# EAGLE board CT_schematic (EAGLE 7.6.0)

Size 100 x 80 mm. Coordinates in mm from the lower left corner, seen from the top.
Outline: 0,0 100,0 100,80 0,80 0,0
Copper layers (1*16): Top 0.035mm / dielectric 1.5mm / Bottom 0.035mm
Design rules "default": minimum track width 10mil, minimum drill 24mil, track to track 8mil, track to pad 8mil, pad to pad 8mil, via to via 8mil, smd to smd 8mil, copper to edge 40mil, drill to drill 8mil, minimum pad ring 10mil, minimum via ring 8mil, stop-mask expansion 4mil, vias tented up to drill 0mil, thermal gap 10mil

## Footprints (pad centres in the part's own frame; a part is rotated, then mirrored left to right if it is on the bottom)
C0603 = smd 0.8 x 0.8: 1 -0.762,0; 2 0.762,0
C0402 = smd 0.5 x 0.5: 1 -0.508,0; 2 0.508,0
C1210 = smd 1.2 x 2.5: 1 -1.524,0; 2 1.524,0
C0805 = smd 1.2 x 1.3: 1 -1.016,0; 2 1.016,0
R0603 = smd 0.8 x 0.8: 1 -0.762,0; 2 0.762,0
EXV-9H = smd 3.505 x 1.676: 1 -2.857,0; 2 2.857,0
L0603 = smd 0.8 x 0.8: 1 -0.762,0; 2 0.762,0
PJ-037B_PACKAGE = drill 3.7 square: 1 12,0 | drill 3.2 square: 2 6,0
LQFP208 = smd 0.3 x 1.2: 1 -12.75,-14.4; 2 -12.25,-14.4; 3 -11.75,-14.4; 4 -11.25,-14.4; 5 -10.75,-14.4; 6 -10.25,-14.4; 7 -9.75,-14.4; 8 -9.25,-14.4; 9 -8.75,-14.4; 10 -8.25,-14.4; 11 -7.75,-14.4; 12 -7.25,-14.4; 13 -6.75,-14.4; 14 -6.25,-14.4; 15 -5.75,-14.4; 16 -5.25,-14.4; 17 -4.75,-14.4; 18 -4.25,-14.4; 19 -3.75,-14.4; 20 -3.25,-14.4; 21 -2.75,-14.4; 22 -2.25,-14.4; 23 -1.75,-14.4; 24 -1.25,-14.4; 25 -0.75,-14.4; 26 -0.25,-14.4; 27 0.25,-14.4; 28 0.75,-14.4; 29 1.25,-14.4; 30 1.75,-14.4; 31 2.25,-14.4; 32 2.75,-14.4; 33 3.25,-14.4; 34 3.75,-14.4; 35 4.25,-14.4; 36 4.75,-14.4; 37 5.25,-14.4; 38 5.75,-14.4; 39 6.25,-14.4; 40 6.75,-14.4; 41 7.25,-14.4; 42 7.75,-14.4; 43 8.25,-14.4; 44 8.75,-14.4; 45 9.25,-14.4; 46 9.75,-14.4; 47 10.25,-14.4; 48 10.75,-14.4; 49 11.25,-14.4; 50 11.75,-14.4; 51 12.25,-14.4; 52 12.75,-14.4; 105 12.75,14.4; 106 12.25,14.4; 107 11.75,14.4; 108 11.25,14.4; 109 10.75,14.4; 110 10.25,14.4; 111 9.75,14.4; 112 9.25,14.4; 113 8.75,14.4; 114 8.25,14.4; 115 7.75,14.4; 116 7.25,14.4; 117 6.75,14.4; 118 6.25,14.4; 119 5.75,14.4; 120 5.25,14.4; 121 4.75,14.4; 122 4.25,14.4; 123 3.75,14.4; 124 3.25,14.4; 125 2.75,14.4; 126 2.25,14.4; 127 1.75,14.4; 128 1.25,14.4; 129 0.75,14.4; 130 0.25,14.4; 131 -0.25,14.4; 132 -0.75,14.4; 133 -1.25,14.4; 134 -1.75,14.4; 135 -2.25,14.4; 136 -2.75,14.4; 137 -3.25,14.4; 138 -3.75,14.4; 139 -4.25,14.4; 140 -4.75,14.4; 141 -5.25,14.4; 142 -5.75,14.4; 143 -6.25,14.4; 144 -6.75,14.4; 145 -7.25,14.4; 146 -7.75,14.4; 147 -8.25,14.4; 148 -8.75,14.4; 149 -9.25,14.4; 150 -9.75,14.4; 151 -10.25,14.4; 152 -10.75,14.4; 153 -11.25,14.4; 154 -11.75,14.4; 155 -12.25,14.4; 156 -12.75,14.4 | smd 1.2 x 0.3: 53 14.4,-12.75; 54 14.4,-12.25; 55 14.4,-11.75; 56 14.4,-11.25; 57 14.4,-10.75; 58 14.4,-10.25; 59 14.4,-9.75; 60 14.4,-9.25; 61 14.4,-8.75; 62 14.4,-8.25; 63 14.4,-7.75; 64 14.4,-7.25; 65 14.4,-6.75; 66 14.4,-6.25; 67 14.4,-5.75; 68 14.4,-5.25; 69 14.4,-4.75; 70 14.4,-4.25; 71 14.4,-3.75; 72 14.4,-3.25; 73 14.4,-2.75; 74 14.4,-2.25; 75 14.4,-1.75; 76 14.4,-1.25; 77 14.4,-0.75; 78 14.4,-0.25; 79 14.4,0.25; 80 14.4,0.75; 81 14.4,1.25; 82 14.4,1.75; 83 14.4,2.25; 84 14.4,2.75; 85 14.4,3.25; 86 14.4,3.75; 87 14.4,4.25; 88 14.4,4.75; 89 14.4,5.25; 90 14.4,5.75; 91 14.4,6.25; 92 14.4,6.75; 93 14.4,7.25; 94 14.4,7.75; 95 14.4,8.25; 96 14.4,8.75; 97 14.4,9.25; 98 14.4,9.75; 99 14.4,10.25; 100 14.4,10.75; 101 14.4,11.25; 102 14.4,11.75; 103 14.4,12.25; 104 14.4,12.75; 157 -14.4,12.75; 158 -14.4,12.25; 159 -14.4,11.75; 160 -14.4,11.25; 161 -14.4,10.75; 162 -14.4,10.25; 163 -14.4,9.75; 164 -14.4,9.25; 165 -14.4,8.75; 166 -14.4,8.25; 167 -14.4,7.75; 168 -14.4,7.25; 169 -14.4,6.75; 170 -14.4,6.25; 171 -14.4,5.75; 172 -14.4,5.25; 173 -14.4,4.75; 174 -14.4,4.25; 175 -14.4,3.75; 176 -14.4,3.25; 177 -14.4,2.75; 178 -14.4,2.25; 179 -14.4,1.75; 180 -14.4,1.25; 181 -14.4,0.75; 182 -14.4,0.25; 183 -14.4,-0.25; 184 -14.4,-0.75; 185 -14.4,-1.25; 186 -14.4,-1.75; 187 -14.4,-2.25; 188 -14.4,-2.75; 189 -14.4,-3.25; 190 -14.4,-3.75; 191 -14.4,-4.25; 192 -14.4,-4.75; 193 -14.4,-5.25; 194 -14.4,-5.75; 195 -14.4,-6.25; 196 -14.4,-6.75; 197 -14.4,-7.25; 198 -14.4,-7.75; 199 -14.4,-8.25; 200 -14.4,-8.75; 201 -14.4,-9.25; 202 -14.4,-9.75; 203 -14.4,-10.25; 204 -14.4,-10.75; 205 -14.4,-11.25; 206 -14.4,-11.75; 207 -14.4,-12.25; 208 -14.4,-12.75
SAMTEC_FTSH-105-01-L-DV-K = smd 0.762 x 2.794: 1 -2.54,-2.032; 2 -2.54,2.032; 3 -1.27,-2.032; 4 -1.27,2.032; 5 0,-2.032; 6 0,2.032; 7 1.27,-2.032; 8 1.27,2.032; 9 2.54,-2.032; 10 2.54,2.032
LBGA-64 = smd 0.559 x 0.559: A1 -3.5,3.5; A2 -2.5,3.5; A3 -1.5,3.5; A4 -0.5,3.5; A5 0.5,3.5; A6 1.5,3.5; A7 2.5,3.5; A8 3.5,3.5; B1 -3.5,2.5; B2 -2.5,2.5; B3 -1.5,2.5; B4 -0.5,2.5; B5 0.5,2.5; B6 1.5,2.5; B7 2.5,2.5; B8 3.5,2.5; C1 -3.5,1.5; C2 -2.5,1.5; C3 -1.5,1.5; C4 -0.5,1.5; C5 0.5,1.5; C6 1.5,1.5; C7 2.5,1.5; C8 3.5,1.5; D1 -3.5,0.5; D2 -2.5,0.5; D3 -1.5,0.5; D4 -0.5,0.5; D5 0.5,0.5; D6 1.5,0.5; D7 2.5,0.5; D8 3.5,0.5; E1 -3.5,-0.5; E2 -2.5,-0.5; E3 -1.5,-0.5; E4 -0.5,-0.5; E5 0.5,-0.5; E6 1.5,-0.5; E7 2.5,-0.5; E8 3.5,-0.5; F1 -3.5,-1.5; F2 -2.5,-1.5; F3 -1.5,-1.5; F4 -0.5,-1.5; F5 0.5,-1.5; F6 1.5,-1.5; F7 2.5,-1.5; F8 3.5,-1.5; G1 -3.5,-2.5; G2 -2.5,-2.5; G3 -1.5,-2.5; G4 -0.5,-2.5; G5 0.5,-2.5; G6 1.5,-2.5; G7 2.5,-2.5; G8 3.5,-2.5; H1 -3.5,-3.5; H2 -2.5,-3.5; H3 -1.5,-3.5; H4 -0.5,-3.5; H5 0.5,-3.5; H6 1.5,-3.5; H7 2.5,-3.5; H8 3.5,-3.5
RHB32_3P45X3P45 = smd 0.85 x 0.28: 1 -2.475,1.75; 2 -2.475,1.25; 3 -2.475,0.75; 4 -2.475,0.25; 5 -2.475,-0.25; 6 -2.475,-0.75; 7 -2.475,-1.25; 8 -2.475,-1.75; 17 2.475,-1.75; 18 2.475,-1.25; 19 2.475,-0.75; 20 2.475,-0.25; 21 2.475,0.25; 22 2.475,0.75; 23 2.475,1.25; 24 2.475,1.75 | smd 0.28 x 0.85: 9 -1.75,-2.475; 10 -1.25,-2.475; 11 -0.75,-2.475; 12 -0.25,-2.475; 13 0.25,-2.475; 14 0.75,-2.475; 15 1.25,-2.475; 16 1.75,-2.475; 25 1.75,2.475; 26 1.25,2.475; 27 0.75,2.475; 28 0.25,2.475; 29 -0.25,2.475; 30 -0.75,2.475; 31 -1.25,2.475; 32 -1.75,2.475 | smd 3.45 x 3.45: 33 0,0
MICRO_USB_AB = smd 0.4 x 1.35: 1 1.3,0.26; 2 0.65,0.26; 3 0,0.26; 4 -0.65,0.26; 5 -1.3,0.26 | drill 0.6 pad 0.95 long: 6 4.175,-2.54; 7 -4.175,-2.54 | drill 0.7 pad 1.1 long: 8 -2.225,0.46; 9 2.225,0.46
SOT143B = smd 1 x 0.7: 1 -0.75,-1 | smd 0.6 x 0.7: 2 0.95,-1; 3 0.95,1; 4 -0.95,1
SOT-23-6 = smd 1.1 x 0.6: 1 -1.4,0.95; 2 -1.4,0; 3 -1.4,-0.95; 4 1.4,-0.95; 5 1.4,0; 6 1.4,0.95
ABLS-25.000MHZ-B2F-T = smd 5.6 x 2.8: 1 -3.81,0; 2 5.69,0
ASEK = smd 1.4 x 1: 1 -1.1,-0.8; 2 1.1,-0.8; 3 1.1,0.8; 4 -1.1,0.8
ASFL1 = smd 1.7 x 1.5: 1 -1.27,-1.1; 2 1.27,-1.1; 3 1.27,1.1; 4 -1.27,1.1
WSON-8 = smd 0.3 x 0.6: 1 -0.75,0; 2 0.05,0; 3 0.85,0; 4 1.65,0; 5 1.65,3.8; 6 0.85,3.8; 7 0.05,3.8; 8 -0.75,3.8 | smd 3 x 2.6: PAD 0.45,1.9
SON-6 = smd 0.55 x 0.3: 1 -0.355,0.5 | smd 0.52 x 0.3: 2 -0.37,0; 3 -0.37,-0.5; 4 0.37,-0.5; 5 0.37,0; 6 0.37,0.5
SW_4-1437565-2 = smd 1.4 x 2.1: 1 -2.23,4.55; 2 -2.23,-4.55; 3 2.23,4.55; 4 2.23,-4.55
LGM67K-G1J2-24-Z = smd 0.8 x 1.4: A -2,0; C 0,0
NC7SZ125M5X = smd 1.3 x 0.7: 1 -1.3,0.95; 2 -1.3,0; 3 -1.3,-0.95; 4 1.3,-0.95; 5 1.3,0.95
DUMMY_PACKAGE_239 = drill 0.3: 1 0,-1; 2 1.5,-1; 3 3,-1

## Placement (x,y rotation side)
C1  1e-06  [C0603]  -78.74,77.47 0 top  (outside the outline)
C2  1e-07  [C0603]  -82.55,77.47 0 top  (outside the outline)
C3  1e-07  [C0603]  -15.24,82.55 0 top  (outside the outline)
C4  1e-07  [C0603]  -19.05,82.55 0 top  (outside the outline)
C5  1e-07  [C0603]  -22.86,82.55 0 top  (outside the outline)
C6  1e-07  [C0603]  -26.67,82.55 0 top  (outside the outline)
C7  1e-07  [C0603]  -30.48,82.55 0 top  (outside the outline)
C8  1e-07  [C0603]  -34.29,82.55 0 top  (outside the outline)
C9  1e-07  [C0603]  -38.1,82.55 0 top  (outside the outline)
C10  1e-07  [C0603]  -41.91,82.55 0 top  (outside the outline)
C11  1e-07  [C0603]  -45.72,82.55 0 top  (outside the outline)
C12  1e-07  [C0603]  -49.53,82.55 0 top  (outside the outline)
C13  1e-07  [C0603]  -53.34,82.55 0 top  (outside the outline)
C14  1e-07  [C0603]  -57.15,82.55 0 top  (outside the outline)
C15  1e-07  [C0603]  -60.96,82.55 0 top  (outside the outline)
C16  1e-07  [C0603]  -64.77,82.55 0 top  (outside the outline)
C17  1e-07  [C0603]  -68.58,82.55 0 top  (outside the outline)
C18  1e-07  [C0603]  -72.39,82.55 0 top  (outside the outline)
C19  1e-07  [C0603]  -76.2,82.55 0 top  (outside the outline)
C20  4.7e-06  [C0603]  -59.69,77.47 0 top  (outside the outline)
C21  2.2e-06  [C0603]  -63.5,77.47 0 top  (outside the outline)
C22  2.2e-06  [C0603]  -67.31,77.47 0 top  (outside the outline)
C23  1e-08  [C0603]  -80.01,82.55 0 top  (outside the outline)
C24  1e-06  [C0603]  -83.82,82.55 0 top  (outside the outline)
C25  1e-07  [C0603]  -15.24,87.63 0 top  (outside the outline)
C26  1e-11  [C0402]  -64.77,87.63 0 top  (outside the outline)
C27  1e-11  [C0402]  -68.58,87.63 0 top  (outside the outline)
C28  1e-07  [C0402]  -72.39,87.63 0 top  (outside the outline)
C29  1e-08  [C0402]  -76.2,87.63 0 top  (outside the outline)
C30  1e-08  [C0402]  -80.01,87.63 0 top  (outside the outline)
C31  1e-07  [C0402]  -83.82,87.63 0 top  (outside the outline)
C32  2.2e-06  [C0603]  -71.12,77.47 0 top  (outside the outline)
C33  1e-07  [C0402]  -15.24,92.71 0 top  (outside the outline)
C34  1e-07  [C0402]  -19.05,92.71 0 top  (outside the outline)
C35  2.2e-06  [C0603]  -74.93,77.47 0 top  (outside the outline)
C36  1e-06  [C0603]  -19.05,87.63 0 top  (outside the outline)
C37  1e-08  [C0402]  -22.86,92.71 0 top  (outside the outline)
C38  1e-08  [C0402]  -26.67,92.71 0 top  (outside the outline)
C39  1e-08  [C0402]  -30.48,92.71 0 top  (outside the outline)
C40  1e-05  [C1210]  -29.21,66.04 0 top  (outside the outline)
C41  1e-05  [C0805]  -83.82,64.77 0 top  (outside the outline)
C42  8e-07  [R0603]  -22.86,87.63 0 top  (outside the outline)
C43  1e-05  [C1210]  -35.56,66.04 0 top  (outside the outline)
C44  1e-08  [C0402]  -34.29,92.71 0 top  (outside the outline)
C45  1e-05  [C1210]  -41.91,66.04 0 top  (outside the outline)
C46  1e-05  [C1210]  -48.26,66.04 0 top  (outside the outline)
C47  1e-07  [C0402]  -38.1,92.71 0 top  (outside the outline)
C48  0.0001  [EXV-9H]  -38.1,58.42 0 top  (outside the outline)
C49  0.0001  [EXV-9H]  -49.53,58.42 0 top  (outside the outline)
C50  1e-08  [C0402]  -41.91,92.71 0 top  (outside the outline)
C51  1e-08  [C0402]  -45.72,92.71 0 top  (outside the outline)
C52  1e-08  [C0402]  -49.53,92.71 0 top  (outside the outline)
C53  1e-08  [C0402]  -53.34,92.71 0 top  (outside the outline)
F1  240.0  [L0603]  -26.67,87.63 0 top  (outside the outline)
J1  PJ-037B  [PJ-037B_PACKAGE]  -27.94,38.1 0 top  (outside the outline)
R2  1000.0  [R0603]  -30.48,87.63 0 top  (outside the outline)
R4  4700.0  [R0603]  -34.29,87.63 0 top  (outside the outline)
R5  4700.0  [R0603]  -38.1,87.63 0 top  (outside the outline)
R6  4700.0  [R0603]  -41.91,87.63 0 top  (outside the outline)
R7  10000.0  [R0603]  -52.07,72.39 0 top  (outside the outline)
R8  10000.0  [R0603]  -57.15,72.39 0 top  (outside the outline)
R9  10000.0  [R0603]  -62.23,72.39 0 top  (outside the outline)
R10  10000.0  [R0603]  -67.31,72.39 0 top  (outside the outline)
R11  10000.0  [R0603]  -72.39,72.39 0 top  (outside the outline)
R12  5.0  [R0603]  -45.72,87.63 0 top  (outside the outline)
R13  10000.0  [R0603]  -77.47,72.39 0 top  (outside the outline)
R14  10000.0  [R0603]  -82.55,72.39 0 top  (outside the outline)
R15  10000.0  [R0603]  -15.24,77.47 0 top  (outside the outline)
R16  10000.0  [R0603]  -20.32,77.47 0 top  (outside the outline)
R17  10000.0  [R0603]  -25.4,77.47 0 top  (outside the outline)
R18  47000.0  [R0603]  -30.48,77.47 0 top  (outside the outline)
R19  10000.0  [R0603]  -35.56,77.47 0 top  (outside the outline)
R20  10000.0  [R0603]  -40.64,77.47 0 top  (outside the outline)
R21  100000.0  [R0603]  -21.59,72.39 0 top  (outside the outline)
R22  806.0  [R0603]  -49.53,87.63 0 top  (outside the outline)
R23  1000.0  [R0603]  -53.34,87.63 0 top  (outside the outline)
R24  100000.0  [R0603]  -26.67,72.39 0 top  (outside the outline)
R25  153694.38  [R0603]  -16.51,72.39 0 top  (outside the outline)
R26  100000.0  [R0603]  -31.75,72.39 0 top  (outside the outline)
R27  100000.0  [R0603]  -36.83,72.39 0 top  (outside the outline)
R28  3900.0  [R0603]  -57.15,87.63 0 top  (outside the outline)
R29  1000.0  [R0603]  -60.96,87.63 0 top  (outside the outline)
R30  10000.0  [R0603]  -45.72,77.47 0 top  (outside the outline)
R31  10000.0  [R0603]  -50.8,77.47 0 top  (outside the outline)
R32  82000.0  [R0603]  -55.88,77.47 0 top  (outside the outline)
R33  300000.0  [R0603]  -41.91,72.39 0 top  (outside the outline)
R34  120000.0  [R0603]  -46.99,72.39 0 top  (outside the outline)
U1  STM32F756BGT6  [LQFP208]  -27.94,15.24 0 top  (outside the outline)
U2  FTSH-105-01-L-DV-K  [SAMTEC_FTSH-105-01-L-DV-K]  -80.01,7.62 0 top  (outside the outline)
U3  mt28ew256aba1HPC-0SIT  [LBGA-64]  -49.53,7.62 0 top  (outside the outline)
U4  TUSB1210BRHBR  [RHB32_3P45X3P45]  -80.01,58.42 0 top  (outside the outline)
U5  47590-0001  [MICRO_USB_AB]  -36.83,38.1 0 top  (outside the outline)
U6  prtr5v0u2ax  [SOT143B]  -66.04,92.71 0 top  (outside the outline)
U7  MAX4995AAUT+T  [SOT-23-6]  -53.34,64.77 0 top  (outside the outline)
U8  ABLS-25.000MHZ-B2F-T  [ABLS-25.000MHZ-B2F-T]  -68.58,58.42 0 top  (outside the outline)
U9  ASEK-32.768KHz-ECST  [ASEK]  -29.21,58.42 0 top  (outside the outline)
U10  ASFL1-19.2MHZ-NCS  [ASFL1]  -66.04,49.53 0 top  (outside the outline)
U11  LP3878SDX-ADJ/NOPB  [WSON-8]  -78.74,33.02 0 top  (outside the outline)
U12  LP2951ACSDX/NOPB  [WSON-8]  -48.26,48.26 0 top  (outside the outline)
U13  LP3878SDX-ADJ/NOPB  [WSON-8]  -30.48,48.26 0 top  (outside the outline)
U14  TPS3895ADRYR  [SON-6]  -74.93,91.44 0 top  (outside the outline)
U15  4-1437565-2  [SW_4-1437565-2]  -57.15,36.83 0 top  (outside the outline)
U16  Q65110A2395  [LGM67K-G1J2-24-Z]  -17.78,66.04 0 top  (outside the outline)
U17  nc7sz125m5x  [NC7SZ125M5X]  -58.42,64.77 0 top  (outside the outline)
U18  nc7sz125m5x  [NC7SZ125M5X]  -64.77,64.77 0 top  (outside the outline)
U19  nc7sz125m5x  [NC7SZ125M5X]  -71.12,64.77 0 top  (outside the outline)
U20  nc7sz125m5x  [NC7SZ125M5X]  -77.47,64.77 0 top  (outside the outline)
U21  Dummy  [DUMMY_PACKAGE_239]  -72.39,92.71 0 top  (outside the outline)

## Library data of the parts
C1-C53 F1 J1 R2 R4-R34 U1-U21 = circuit_tree

## Nets
CLK_CRYSTAL_U1_32: C26.1 U1.32 U8.1
CLK_CRYSTAL_U1_33: C27.1 U1.33 U8.2
CLK_U1_9: U1.9 U9.3
CLK_U4_1: U4.1 U10.3
GND: C1.2 C2.2 C3.2 C4.2 C5.2 C6.2 C7.2 C8.2 C9.2 C10.2 C11.2 C12.2 C13.2 C14.2 C15.2 C16.2 C17.2 C18.2 C19.2 C20.2 C21.2 C22.2 C23.2 C24.2 C25.2 C26.2 C27.2 C28.2 C29.2 C30.2 C31.2 C32.2 C33.2 C34.2 C35.2 C36.2 C37.2 C38.2 C39.2 C40.2 C41.2 C42.2 C43.2 C44.2 C45.2 C46.2 C47.2 C48.2 C49.2 C50.2 C51.2 C52.2 C53.2 J1.2 R2.2 R7.2 R12.2 R18.2 R20.2 R23.2 R26.2 R29.2 R32.2 R34.2 U1.14 U1.25 U1.40 U1.51 U1.60 U1.72 U1.82 U1.93 U1.114 U1.125 U1.136 U1.149 U1.170 U1.184 U1.202 U2.3 U2.5 U3.E8 U3.H2 U3.H7 U4.33 U5.5 U5.6 U5.7 U5.8 U5.9 U6.1 U7.2 U9.2 U10.2 U11.3 U11.PAD U12.3 U12.4 U12.PAD U13.3 U13.PAD U14.2 U16.C U17.2 U17.3 U18.1 U18.3 U19.1 U19.3 U20.1 U20.3 U21.1
NET_U1_34: R5.1 U1.34 U19.4
NET_U1_42: C23.1 C24.1 F1.1 U1.41 U1.42
NET_U1_92: C21.1 U1.92
NET_U1_148: C22.1 U1.148
NET_U1_197: R7.1 U1.197
NET_U1_203: R8.1 U1.203
NET_U1_207: U16.A
NET_U1_208: U15.3 U15.4
NET_U2_9: R12.1 U2.9
NET_U3_B4: R16.1 U3.B4
NET_U3_B5: R4.1 U3.B5 U18.4
NET_U4_11: R19.1 U4.11
NET_U4_12: C35.1 U4.12
NET_U4_14: R20.1 U4.14
NET_U4_20: C32.1 U4.20
NET_U4_27: R6.1 U4.27 U20.4
NET_U5_1: C36.1 U4.22 U5.1 U6.4 U7.1
NET_U5_2: U4.19 U5.2 U6.3
NET_U5_3: U4.18 U5.3 U6.2
NET_U5_4: U4.23 U5.4
NET_U7_3: R18.1 U7.3
NET_U7_4: U4.17 U7.4
NET_U11_1: C39.1 U11.1
NET_U11_6: R22.2 R23.1 U11.6
NET_U11_8: R21.1 U11.8
NET_U12_5: R24.1 U12.5
NET_U12_7: R25.2 R26.1 U12.7
NET_U13_1: C44.1 U13.1
NET_U13_6: R28.2 R29.1 U13.6
NET_U13_8: R27.1 U13.8
NET_U14_1: R31.1 R32.1 U14.1
NET_U14_3: R33.2 R34.1 U14.3
NET_U14_4: R30.1 U14.4 U17.4 U18.2 U19.2 U20.2
NET_U15_1: R2.1 U15.1 U15.2
PROC_FMC_A0: U1.16 U3.E2
PROC_FMC_A1: U1.17 U3.D2
PROC_FMC_A2: U1.18 U3.C2
PROC_FMC_A3: U1.22 U3.A2
PROC_FMC_A4: U1.23 U3.B2
PROC_FMC_A5: U1.24 U3.D3
PROC_FMC_A6: U1.71 U3.C3
PROC_FMC_A7: U1.74 U3.A3
PROC_FMC_A8: U1.75 U3.B6
PROC_FMC_A9: U1.76 U3.A6
PROC_FMC_A10: U1.77 U3.C6
PROC_FMC_A11: U1.78 U3.D6
PROC_FMC_A12: U1.129 U3.B7
PROC_FMC_A13: U1.130 U3.A7
PROC_FMC_A14: U1.131 U3.C7
PROC_FMC_A15: U1.132 U3.D7
PROC_FMC_A16: U1.111 U3.E7
PROC_FMC_A17: U1.112 U3.B3
PROC_FMC_A18: U1.113 U3.C4
PROC_FMC_A19: U1.2 U3.D5
PROC_FMC_A20: U1.3 U3.D4
PROC_FMC_A21: U1.4 U3.C5
PROC_FMC_A22: U1.5 U3.B8
PROC_FMC_A23: U1.1 U3.C8
PROC_FMC_D0: U1.116 U3.E3
PROC_FMC_D1: U1.117 U3.H3
PROC_FMC_D2: U1.164 U3.E4
PROC_FMC_D3: U1.165 U3.H4
PROC_FMC_D4: U1.79 U3.H5
PROC_FMC_D5: U1.80 U3.E5
PROC_FMC_D6: U1.81 U3.H6
PROC_FMC_D7: U1.84 U3.E6
PROC_FMC_D8: U1.85 U3.F3
PROC_FMC_D9: U1.86 U3.G3
PROC_FMC_D10: U1.87 U3.F4
PROC_FMC_D11: U1.88 U3.G4
PROC_FMC_D12: U1.89 U3.F5
PROC_FMC_D13: U1.108 U3.G6
PROC_FMC_D14: U1.109 U3.F6
PROC_FMC_D15: U1.110 U3.G7
PROC_FMC_NBL0: R17.1 U1.200 U3.F7
PROC_FMC_NE2: R13.1 U1.178 U3.F2
PROC_FMC_NOE: R14.1 U1.168 U3.G2
PROC_FMC_NWAIT: U1.172 U3.A4
PROC_FMC_NWE: R15.1 U1.169 U3.A5
PROC_PC13: U1.8 U21.3
PROC_PI8: U1.7 U21.2
PROC_SYS_JTCK_SWCLK: R10.1 U1.159 U2.4
PROC_SYS_JTDO_SWO: U1.192 U2.6
PROC_SYS_JTMS_SWDIO: R11.1 U1.147 U2.2
PROC_USB_OTG_HS_ULPI_CK: U1.54 U4.26
PROC_USB_OTG_HS_ULPI_D0: U1.50 U4.3
PROC_USB_OTG_HS_ULPI_D1: U1.61 U4.4
PROC_USB_OTG_HS_ULPI_D2: U1.62 U4.5
PROC_USB_OTG_HS_ULPI_D3: U1.90 U4.6
PROC_USB_OTG_HS_ULPI_D4: U1.91 U4.7
PROC_USB_OTG_HS_ULPI_D5: U1.104 U4.9
PROC_USB_OTG_HS_ULPI_D6: U1.105 U4.10
PROC_USB_OTG_HS_ULPI_D7: U1.194 U4.13
PROC_USB_OTG_HS_ULPI_DIR: U1.13 U4.31
PROC_USB_OTG_HS_ULPI_NXT: U1.38 U4.2
PROC_USB_OTG_HS_ULPI_STP: U1.35 U4.29
RST_OUT_U2_JTAG_RST_B: R9.1 U2.10 U17.1
VCC_S1_13V8: C40.1 C42.1 C45.1 C48.1 C49.1 J1.1 R21.2 R27.2 U11.4 U12.8 U13.4
VCC_TIER1_1V8: C1.1 C2.1 C3.1 C4.1 C5.1 C6.1 C7.1 C8.1 C9.1 C10.1 C11.1 C12.1 C13.1 C14.1 C15.1 C16.1 C17.1 C18.1 C19.1 C20.1 C28.1 C29.1 C33.1 C34.1 C41.1 C47.1 C50.1 C51.1 C52.1 C53.1 F1.2 R4.2 R5.2 R6.2 R8.2 R9.2 R10.2 R11.2 R13.2 R14.2 R15.2 R16.2 R17.2 R19.2 R22.1 R30.2 R31.2 R33.1 U1.6 U1.15 U1.26 U1.39 U1.52 U1.59 U1.73 U1.83 U1.94 U1.103 U1.115 U1.124 U1.150 U1.158 U1.171 U1.185 U1.204 U2.1 U3.D8 U3.F1 U4.28 U4.30 U4.32 U11.5 U14.6 U17.5 U18.5 U19.5 U20.5
VCC_TIER1_3V3: C25.1 C30.1 C31.1 C37.1 C38.1 C43.1 R24.2 R25.1 U1.137 U3.G5 U4.21 U9.4 U10.4 U12.1
VCC_TIER1_5V0: C46.1 R28.1 U7.5 U13.5

## Tracks (layer width: path | path; a pad name or v marks a point on that pad's centre or on a via)
CLK_CRYSTAL_U1_32  (2 unrouted)
CLK_CRYSTAL_U1_33  (2 unrouted)
CLK_U1_9  (1 unrouted)
CLK_U4_1  (1 unrouted)
GND  (111 unrouted)
NET_U1_34  (2 unrouted)
NET_U1_42  (4 unrouted)
NET_U1_92  (1 unrouted)
NET_U1_148  (1 unrouted)
NET_U1_197  (1 unrouted)
NET_U1_203  (1 unrouted)
NET_U1_208  (1 unrouted)
NET_U2_9  (1 unrouted)
NET_U3_B4  (1 unrouted)
NET_U3_B5  (2 unrouted)
NET_U4_11  (1 unrouted)
NET_U4_12  (1 unrouted)
NET_U4_14  (1 unrouted)
NET_U4_20  (1 unrouted)
NET_U4_27  (2 unrouted)
NET_U5_1  (4 unrouted)
NET_U5_2  (2 unrouted)
NET_U5_3  (2 unrouted)
NET_U5_4  (1 unrouted)
NET_U7_3  (1 unrouted)
NET_U7_4  (1 unrouted)
NET_U11_1  (1 unrouted)
NET_U11_6  (2 unrouted)
NET_U11_8  (1 unrouted)
NET_U12_5  (1 unrouted)
NET_U12_7  (2 unrouted)
NET_U13_1  (1 unrouted)
NET_U13_6  (2 unrouted)
NET_U13_8  (1 unrouted)
NET_U14_1  (2 unrouted)
NET_U14_3  (2 unrouted)
NET_U14_4  (5 unrouted)
NET_U15_1  (2 unrouted)
PROC_FMC_A0  (1 unrouted)
PROC_FMC_A1  (1 unrouted)
PROC_FMC_A2  (1 unrouted)
PROC_FMC_A3  (1 unrouted)
PROC_FMC_A4  (1 unrouted)
PROC_FMC_A5  (1 unrouted)
PROC_FMC_A6  (1 unrouted)
PROC_FMC_A7  (1 unrouted)
PROC_FMC_A8  (1 unrouted)
PROC_FMC_A9  (1 unrouted)
PROC_FMC_A10  (1 unrouted)
PROC_FMC_A11  (1 unrouted)
PROC_FMC_A12  (1 unrouted)
PROC_FMC_A13  (1 unrouted)
PROC_FMC_A14  (1 unrouted)
PROC_FMC_A15  (1 unrouted)
PROC_FMC_A16  (1 unrouted)
PROC_FMC_A17  (1 unrouted)
PROC_FMC_A18  (1 unrouted)
PROC_FMC_A19  (1 unrouted)
PROC_FMC_A20  (1 unrouted)
PROC_FMC_A21  (1 unrouted)
PROC_FMC_A22  (1 unrouted)
PROC_FMC_A23  (1 unrouted)
PROC_FMC_D0  (1 unrouted)
PROC_FMC_D1  (1 unrouted)
PROC_FMC_D2  (1 unrouted)
PROC_FMC_D3  (1 unrouted)
PROC_FMC_D4  (1 unrouted)
PROC_FMC_D5  (1 unrouted)
PROC_FMC_D6  (1 unrouted)
PROC_FMC_D7  (1 unrouted)
PROC_FMC_D8  (1 unrouted)
PROC_FMC_D9  (1 unrouted)
PROC_FMC_D10  (1 unrouted)
PROC_FMC_D11  (1 unrouted)
PROC_FMC_D12  (1 unrouted)
PROC_FMC_D13  (1 unrouted)
PROC_FMC_D14  (1 unrouted)
PROC_FMC_D15  (1 unrouted)
PROC_FMC_NBL0  (2 unrouted)
PROC_FMC_NE2  (2 unrouted)
PROC_FMC_NOE  (2 unrouted)
PROC_FMC_NWAIT  (1 unrouted)
PROC_FMC_NWE  (2 unrouted)
PROC_PC13  (1 unrouted)
PROC_PI8  (1 unrouted)
PROC_SYS_JTCK_SWCLK  (2 unrouted)
PROC_SYS_JTDO_SWO  (1 unrouted)
PROC_SYS_JTMS_SWDIO  (2 unrouted)
PROC_USB_OTG_HS_ULPI_CK  (1 unrouted)
PROC_USB_OTG_HS_ULPI_D0  (1 unrouted)
PROC_USB_OTG_HS_ULPI_D1  (1 unrouted)
PROC_USB_OTG_HS_ULPI_D2  (1 unrouted)
PROC_USB_OTG_HS_ULPI_D3  (1 unrouted)
PROC_USB_OTG_HS_ULPI_D4  (1 unrouted)
PROC_USB_OTG_HS_ULPI_D5  (1 unrouted)
PROC_USB_OTG_HS_ULPI_D6  (1 unrouted)
PROC_USB_OTG_HS_ULPI_D7  (1 unrouted)
PROC_USB_OTG_HS_ULPI_DIR  (1 unrouted)
PROC_USB_OTG_HS_ULPI_NXT  (1 unrouted)
PROC_USB_OTG_HS_ULPI_STP  (1 unrouted)
RST_OUT_U2_JTAG_RST_B  (2 unrouted)
VCC_S1_13V8  (10 unrouted)
VCC_TIER1_1V8  (76 unrouted)
VCC_TIER1_3V3  (13 unrouted)
VCC_TIER1_5V0  (3 unrouted)